# EAGLE board Transmitter-Bug-2SC9014 (EAGLE 7.2.0)

Size 160 x 100 mm. Coordinates in mm from the lower left corner, seen from the top.
Outline: 0,0 160,0 160,100 0,100 0,0
Copper layers (1*16): Top 0.035mm / dielectric 1.5mm / Bottom 0.035mm
Design rules "default": minimum track width 10mil, minimum drill 24mil, track to track 8mil, track to pad 8mil, pad to pad 8mil, via to via 8mil, smd to smd 8mil, copper to edge 40mil, drill to drill 8mil, minimum pad ring 10mil, minimum via ring 8mil, stop-mask expansion 4mil, vias tented up to drill 0mil, thermal gap 10mil
Net classes: 0 default: width 0.61 mm

## Footprints (pad centres in the part's own frame; a part is rotated, then mirrored left to right if it is on the bottom)
SPAD = drill 1 pad 1.93: 1 0,0
TRIM-2222-808 = drill 1.1 octagon: 1 -2.54,2.54; 2 -2.54,-2.54; 3 2.54,-2.54
C025-015X024 = drill 0.8: 1 0,1.27; 2 0,-1.27
C050-020X036/V = drill 0.8: 1 0,-2.54; 2 0,2.54
ECM-5 = drill 0.7 pad 1.2 octagon: 1 0,1.27 | drill 0.7 pad 1.2: 2 0,-1.27
CONN-3P = drill 0.9 pad 1.778 square: 1 0,0 | drill 0.9 pad 1.778 octagon: 2 2.54,0; 3 5.08,0
CONN-2P-V = drill 1.2 pad 1.778 square: 1 0,0 | drill 1.2 pad 1.93 octagon: 2 0,2.54
L-04-2/5V-X = drill 0.8: 1 1.27,2.54; 2 -1.27,-2.54
0204/2V = drill 0.8: 1 -1.27,0; 2 1.27,0
0204/7-V = drill 0.8: 1 0,3.81; 2 0,-3.81
0204/10-V = drill 0.8: 1 0,5.08; 2 0,-5.08
TO92-EBC = drill 0.8 octagon: B 0,-1.27; C 2.54,-1.27; E -2.54,-1.27

## Placement (x,y rotation side)
9V  SPAD  [SPAD]  -19.05,30.48 0 top  (outside the outline)
ANT  ANT  [SPAD]  -22.86,30.48 0 top  (outside the outline)
C1  1.6-15pF  [TRIM-2222-808]  -29.21,5.08 0 top  (outside the outline)
C2  4.7pF  [C025-015X024]  -29.21,25.4 0 top  (outside the outline)
C3  1nF  [C050-020X036/V]  -21.59,25.4 0 top  (outside the outline)
C4  10nF  [C050-020X036/V]  -25.4,25.4 0 top  (outside the outline)
ECM1  ECM-5  [ECM-5]  -34.29,25.4 0 top  (outside the outline)
GND  SPAD  [SPAD]  -26.67,30.48 0 top  (outside the outline)
J1  CONN-3P-3P  [CONN-3P]  -20.32,17.78 0 top  (outside the outline)
JP1  CONN-2P2P/V  [CONN-2P-V]  -34.29,15.24 0 top  (outside the outline)
L2  1μH  [L-04-2/5V-X]  -16.51,25.4 0 top  (outside the outline)
R1  100Ω  [0204/2V]  -15.24,33.02 0 top  (outside the outline)
R2  47kΩ  [0204/7-V]  -19.05,5.08 0 top  (outside the outline)
R3  10kΩ  [0204/10-V]  -13.97,6.35 0 top  (outside the outline)
R4  47kΩ  [0204/7-V]  -22.86,5.08 0 top  (outside the outline)
R5  4.7kΩ  [0204/10-V]  -16.51,6.35 0 top  (outside the outline)
T1  2SC9014  [TO92-EBC]  -27.94,17.78 0 top  (outside the outline)

## Library data of the parts
9V ANT GND = pad
C1 = cap-trim
C2-C4 = c
ECM1 = ECM
J1 JP1 = pinconn
L2 = l
R1-R5 = r
T1 = t

## Nets
+UB: 9V.1 C1.3 L2.1 R3.1 R5.1
GND: C3.2 ECM1.2 GND.1 J1.2 R1.1
N$1: J1.3 R4.1
N$2: ANT.1 C1.2 C2.1 L2.2 T1.C
N$3: C2.2 R1.2 T1.E
N$4: J1.1 R2.1
N$5: C3.1 C4.1 R3.2 T1.B
N$6: C4.2 JP1.2 R2.2 R4.2
N$7: ECM1.1 JP1.1 R5.2

## Tracks (layer width: path | path; a pad name or v marks a point on that pad's centre or on a via)
+UB  (4 unrouted)
GND  (4 unrouted)
N$1  (1 unrouted)
N$2  (4 unrouted)
N$3  (2 unrouted)
N$4  (1 unrouted)
N$5  (3 unrouted)
N$6  (3 unrouted)
N$7  (2 unrouted)